# Altium PCB STM32控制器.PCBDOC (part 2 of 2)
Units mil, origin at the board's own origin, x right, y up, seen from the top; angles counter-clockwise.
Board outline 2755.91 x 393.7 mil, 4 copper layers (Top Layer, 2, 3, Bottom Layer), stack 30.634 mil thick; 86 components, 64 nets, 285 pads, 84 vias.
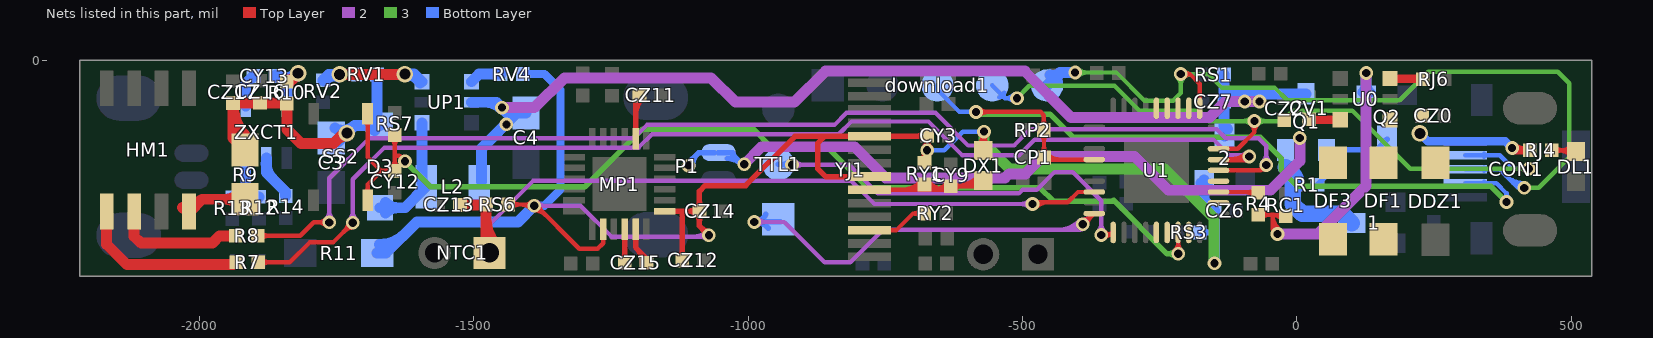
[diagram p4: the nets of this part, all layers, seen from the top]

## Via types
v1: diameter 25, hole 15, Top Layer to Bottom Layer, 77 vias
v2: diameter 30, hole 20, Top Layer to Bottom Layer, 7 vias

## Nets (pads, with @x,y where several pads share a name; then routed paths per layer and width w, separated by ;. In a path a pad name is that pad's centre, name@x,y a point inside that pad or via, vN(x,y) a via of type N, cw(c..) or ccw(c..) an arc to the next point about the centre after c; other vN are vias at no path point) (continued)
NetCY9_2: CY9.2 DX1.1 RY1.1 YJ1.9 | length 883.8
  Top Layer w8: YJ1.9@-778.62,-235.91 CY9.2@-637.06,-235.91 ; DX1.1@-571.57,-218.96 -582.05,-229.44 CY9.2@-630.6,-229.44 CY9.2@-637.06,-235.91 ; -737.78,-235.91 cw(c-737.78,-226.56) -744.39,-233.17 ccw(c-737.78,-226.56) -737.78,-235.91 ; -737.78,-235.91 ccw(c-737.78,-245.26) -744.39,-238.65 cw(c-737.78,-245.26) -737.78,-235.91 ; CY9.2@-637.07,-235.91 cw(c-637.07,-188.09) -672.26,-220.46 ccw(c-637.07,-188.09) CY9.2@-637.07,-235.91 ; -610.07,-229.44 cw(c-610.07,-208.92) -624.58,-223.43 ccw(c-610.07,-208.92) -610.07,-229.44 ; -610.07,-229.44 ccw(c-610.07,-249.96) -624.58,-235.45 cw(c-610.07,-249.96) -610.07,-229.44 ; -722.44,-235.91 ccw(c-722.44,-182.29) -684.53,-220.2 cw(c-722.44,-182.29) -722.44,-235.91 ; -703.13,-235.91 ccw(c-703.13,-201.6) -678.87,-225.86 cw(c-703.13,-201.6) -703.13,-235.91 ; RY1.1@-678.15,-225.88 ccw(c-655.29,-204.85) -655.29,-235.91 cw(c-655.29,-204.85) RY1.1@-678.15,-225.88 ; RY1.1@-666.73,-235.91 ccw(c-666.73,-193.3) -636.61,-223.43 cw(c-666.73,-193.3) RY1.1@-666.73,-235.91 ; -647.42,-235.91 ccw(c-647.42,-212.61) -630.95,-229.09 cw(c-647.42,-212.61) -647.42,-235.91 ; CY9.2@-624.64,-229.44 ccw(c-624.64,-166.89) -580.41,-211.12 cw(c-624.64,-166.89) CY9.2@-624.64,-229.44 ; -605.32,-229.44 ccw(c-605.32,-186.2) -574.75,-216.78 cw(c-605.32,-186.2) -605.32,-229.44 ; DX1.1@-586.01,-229.44 ccw(c-586.01,-205.52) -569.09,-222.43 cw(c-586.01,-205.52) DX1.1@-586.01,-229.44
NetCY13_1: CY13.1 ZXCT1.4 | length 60.9
  Bottom Layer w20: ZXCT1.4@-1915.88,-83.33 -1915.88,-42.31 CY13.1@-1901.86,-28.29
NetCY13_2: CY13.2 R10.1 ZXCT1.5 | length 314.3
  Top Layer w20: v2(-1820.3,-23.26) -1835.61,-38.57 R10.1@-1840.91,-38.57 ; R10.1@-1840.91,-38.57 ccw(c-1840.91,-22.95) -1825.3,-23.19 cw(c-1840.91,-22.95) R10.1@-1840.91,-38.57 ; R10.1@-1840.91,-36.07 ccw(c-1840.91,-17.22) -1827.58,-30.55 cw(c-1840.91,-17.22) R10.1@-1840.91,-36.07
  Bottom Layer w20: CY13.2@-1861.86,-28.29 -1853.12,-28.29 -1841.08,-40.33 ; ZXCT1.5@-1841.08,-83.33 -1841.08,-40.33 ; v2(-1820.3,-23.26) v2@-1824.01,-23.26 ; -1841.08,-40.33 v2@-1824.01,-23.26 ; v2@-1824.01,-23.26 cw(c-1843.97,-3.3) -1860.41,-26.26 ccw(c-1843.97,-3.3) v2@-1824.01,-23.26 ; -1835.17,-34.43 cw(c-1820.3,-49.3) -1820.3,-28.26 ccw(c-1820.3,-49.3) -1835.17,-34.43
NetCZ11_2: CZ11.2 MP1.20 | length 178.9
  Top Layer w10: MP1.20@-1205.37,-142.54 CZ11.2@-1205.37,-61.9 ; -1205.37,-99.68 cw(c-1162.03,-99.68) -1192.67,-69.04 ccw(c-1162.03,-99.68) -1205.37,-99.68 ; CZ11.2@-1205.37,-75.54 cw(c-1186.17,-75.54) -1199.74,-61.97 ccw(c-1186.17,-75.54) CZ11.2@-1205.37,-75.54
NetCZ15_1: CZ15.1 MP1.11 | length 128.2
  Top Layer w10: MP1.11@-1205.37,-307.89 -1205.37,-340.82 -1185.24,-360.95 CZ15.1@-1185.24,-368.96 ; -1203.71,-342.48 cw(c-1230.19,-368.96) -1192.74,-368.96 ccw(c-1230.19,-368.96) -1203.71,-342.48
NetCZ15_2: CZ15.2 MP1.10 | length 118
  Top Layer w10: CZ15.2@-1225.24,-368.96 -1225.05,-368.77 MP1.10@-1225.05,-307.89 ; CZ15.2@-1230.55,-363.65 ccw(c-1243.81,-350.39) -1225.05,-350.39 cw(c-1243.81,-350.39) CZ15.2@-1230.55,-363.65 ; -1225.05,-351.31 ccw(c-1207.6,-351.31) -1219.94,-363.65 cw(c-1207.6,-351.31) -1225.05,-351.31
NetD3_1: D3.1 L2.2 UP1.1 | length 323.1
  Bottom Layer w20: D3.1@-1671.11,-268.43 -1625.34,-268.43 L2.2@-1586.98,-230.06 -1594.89,-222.15 UP1.1@-1594.89,-113.55 ; -1638.22,-268.43 cw(c-1638.22,-235.54) -1661.47,-258.8 ccw(c-1638.22,-235.54) -1638.22,-268.43 ; -1638.22,-268.43 ccw(c-1638.22,-301.32) -1661.47,-278.06 cw(c-1638.22,-301.32) -1638.22,-268.43
NetDF1_2: DF1.2 DF3.1
NetDL1_1: DL1.1 RJ4.2 | length 204
  Top Layer w8: RJ4.2@464.9,-163.64 506.6,-163.64 DL1.1@508.73,-165.77 ; 485.42,-163.64 cw(c485.42,-143.12) 470.91,-157.63 ccw(c485.42,-143.12) 485.42,-163.64 ; 485.42,-163.64 ccw(c485.42,-184.16) 470.91,-169.65 cw(c485.42,-184.16) 485.42,-163.64 ; RJ4.2@475.82,-163.64 cw(c475.82,-197.69) 499.89,-173.61 ccw(c475.82,-197.69) RJ4.2@475.82,-163.64 ; 481.29,-163.64 ccw(c481.29,-137.33) 499.89,-155.94 cw(c481.29,-137.33) 481.29,-163.64
NetHM1_1: HM1.1 R7.1 | length 346.4
  Top Layer w20: HM1.1@-2169.32,-275.26 -2169.32,-335.17 -2132.18,-372.31 -1937.55,-372.31 R7.1@-1933.14,-367.9 ; -1949.81,-372.31 ccw(c-1949.81,-351.23) -1934.91,-366.13 cw(c-1949.81,-351.23) -1949.81,-372.31
NetHM1_2: HM1.2 R8.1 | length 241.1
  Top Layer w20: HM1.2@-2119.32,-275.26 -2119.32,-320.48 -2107.06,-332.73 -1976.65,-332.73 -1963.47,-319.55 R8.1@-1933.99,-319.55
NetHM1_4: HM1.4 R9.2 | length 321.6
  Top Layer w20: HM1.4@-2019.32,-275.26 -2017.49,-275.26 -1995.18,-252.95 ; R9.2@-1917.23,-252.95 -1995.18,-252.95 ; -1995.18,-252.95 cw(c-2006.65,-241.48) -2017.63,-253.42 ccw(c-2006.65,-241.48) -1995.18,-252.95 ; -1953.44,-252.95 cw(c-1953.44,-289.16) -1927.83,-263.56 ccw(c-1953.44,-289.16) -1953.44,-252.95 ; -1953.44,-252.95 ccw(c-1953.44,-216.74) -1927.83,-242.34 cw(c-1953.44,-216.74) -1953.44,-252.95 ; HM1.4@-2031.17,-268.14 ccw(c-2020.78,-256.84) -2009.93,-267.69 cw(c-2020.78,-256.84) HM1.4@-2031.17,-268.14
NetQ1_1: Q1.1 Q2.1 R1.2 | length 188.5
  Bottom Layer w10: R1.2@37.77,-226.5 54.31,-209.95 Q1.1@54.31,-163.12 144.88,-163.12 Q2.1@164.47,-143.54
NetQ2_2: Q2.2 R4.1 RC1.2 | length 858
  Top Layer w8: R4.1@-70.33,-281.01 RC1.2@-22.8,-281.01 ; v1(-34.98,-316.4) -44.19,-307.19 ; -49.81,-281.01 cw(c-49.81,-260.49) -64.32,-275 ccw(c-49.81,-260.49) -49.81,-281.01 ; -49.81,-281.01 ccw(c-49.81,-301.53) -64.32,-287.02 cw(c-49.81,-301.53) -49.81,-281.01 ; -44.18,-307.19 cw(c-48.24,-311.24) -42.9,-313.32 ccw(c-48.24,-311.24) -44.18,-307.19 ; -44.18,-307.19 ccw(c-40.13,-303.14) -38.06,-308.48 cw(c-40.13,-303.14) -44.18,-307.19 ; -44.19,-307.19 -44.19,-281.01 ; -44.19,-281.01 ccw(c-8.47,-281.01) -29.88,-309.6 cw(c-8.47,-281.01) -44.19,-281.01 ; -46.84,-281.01 cw(c-46.84,-310.04) -26.31,-289.51 ccw(c-46.84,-310.04) -46.84,-281.01 ; -44.19,-297 ccw(c-20.44,-297) -34.68,-316 cw(c-20.44,-297) -44.19,-297 ; -34.8,-281.01 ccw(c-34.8,-269) -26.31,-277.49 cw(c-34.8,-269) -34.8,-281.01
  2 w20: v1(-34.98,-316.4) 39.02,-316.4 126.47,-228.95 v1(126.47,-22.69)
  Bottom Layer w20: Q2.2@126.47,-63.54 v1(126.47,-22.69) ; 126.47,-44.22 cw(c107.16,-44.22) 120.81,-57.88 ccw(c107.16,-44.22) 126.47,-44.22 ; 126.47,-44.22 ccw(c145.78,-44.22) 132.13,-57.88 cw(c145.78,-44.22) 126.47,-44.22
NetR12_2: R12.2 R13.2 ZXCT1.3 | length 119.9
  Bottom Layer w20: R13.2@-1940.43,-249.47 -1939.38,-248.42 R12.2@-1891.56,-248.42 ; -1915.88,-248.41 ZXCT1.3@-1915.88,-177.82
NetR14_2: R14.2 ZXCT1.2 | length 145
  Bottom Layer w20: ZXCT1.2@-1878.48,-177.82 -1878.48,-203.94 -1843.02,-239.4 R14.2@-1843.02,-246.99 ; ZXCT1.2@-1878.64,-187.66 ccw(c-1839.74,-187.66) -1867.24,-215.17 cw(c-1839.74,-187.66) ZXCT1.2@-1878.64,-187.66
NetRJ6_1: RJ6.1 U0.6 | length 132.4
  Top Layer w15: U0.6@169.73,-33.18 228.38,-33.18 RJ6.1@229.44,-34.24 ; 184.89,-33.18 cw(c184.89,-18.02) 174.17,-28.74 ccw(c184.89,-18.02) 184.89,-33.18 ; 184.89,-33.18 ccw(c184.89,-48.34) 174.17,-37.62 cw(c184.89,-48.34) 184.89,-33.18 ; 214.81,-33.18 cw(c214.81,-48.86) 225.9,-37.77 ccw(c214.81,-48.86) 214.81,-33.18
NetRV1_1: RV1.1 RV2.1 UP1.3 | length 461.3
  Top Layer w20: v2(-1744.57,-25.49) -1626.45,-25.49 v2(-1625.64,-24.68)
  Bottom Layer w20: RV2.1@-1775.14,-36.02 -1764.61,-25.49 RV1.1@-1716.69,-25.49 ; UP1.3@-1594.89,-38.74 -1608.96,-24.68 v2(-1625.64,-24.68) ; v2(-1625.64,-24.68) cw(c-1625.64,-56.31) -1598.18,-40.62 ccw(c-1625.64,-56.31) v2(-1625.64,-24.68) ; RV2.1@-1774.63,-35.5 cw(c-1756.58,-53.56) -1746.54,-30.08 ccw(c-1756.58,-53.56) RV2.1@-1774.63,-35.5 ; RV2.1@-1773.37,-37.78 cw(c-1743.68,-67.47) -1743.68,-25.49 ccw(c-1743.68,-67.47) RV2.1@-1773.37,-37.78 ; v2@-1623.46,-29.17 cw(c-1614.74,-47.13) -1600.62,-33.02 ccw(c-1614.74,-47.13) v2@-1623.46,-29.17
NetRV4_2: RV4.2 UP1.4 | length 59.3
  Bottom Layer w20: UP1.4@-1504.34,-38.74 -1490.32,-24.72 RV4.2@-1450.83,-24.72
NetRY2_2: RY2.2 YJ1.12 | length 206.1
  Top Layer w8: YJ1.12@-778.62,-309.14 -729.77,-309.14 -699.53,-278.9 RY2.2@-678.9,-278.9 ; -737.78,-309.14 cw(c-737.78,-299.78) -744.39,-306.4 ccw(c-737.78,-299.78) -737.78,-309.14 ; -737.78,-309.14 ccw(c-737.78,-318.49) -744.39,-311.88 cw(c-737.78,-318.49) -737.78,-309.14 ; -699.42,-278.9 cw(c-699.42,-299.42) -684.91,-284.91 ccw(c-699.42,-299.42) -699.42,-278.9 ; -699.42,-278.9 ccw(c-699.42,-258.38) -684.91,-272.89 cw(c-699.42,-258.38) -699.42,-278.9
PA0: CZ13.2 NTC1.1 RS6.2 U1.7 | length 1750.9
  Top Layer w8: v1(-481.82,-261.6) -478.63,-258.42 -417.64,-258.42 -398.9,-239.68 U1.7@-369.06,-239.68 ; v1@-475.81,-267.61 cw(c-453.61,-289.81) -453.61,-258.42 ccw(c-453.61,-289.81) v1@-475.81,-267.61 ; v1@-475.81,-255.59 ccw(c-468.99,-248.77) -468.99,-258.42 cw(c-468.99,-248.77) v1@-475.81,-255.59
  Top Layer w20: CZ13.2@-1525.37,-263.23 -1478.35,-263.23 RS6.2@-1477.71,-262.59 -1477.71,-346.72 NTC1.1@-1480.55,-349.56 ; NTC1.1@-1485.42,-337.03 ccw(c-1504.04,-318.41) -1477.71,-318.41 cw(c-1504.04,-318.41) NTC1.1@-1485.42,-337.03 ; -1477.71,-288.99 ccw(c-1409.76,-288.99) -1457.8,-337.03 cw(c-1409.76,-288.99) -1477.71,-288.99
  2 w8: NTC1.1@-1487.23,-330.65 ccw(c-1511.84,-298.83) -1471.61,-298.83 ; NTC1.1@-1482.34,-336.98 ccw(c-1499.24,-315.13) -1471.61,-315.13 ccw(c-1443.99,-315.13) NTC1.1@-1460.89,-336.98 ; NTC1.1@-1471.61,-350.84 -1471.61,-298.82 ; NTC1.1@-1455.99,-330.65 cw(c-1431.38,-298.83) -1471.61,-298.83 ; v1(-481.82,-261.6) -769.99,-261.6 -812.07,-219.52 -1392.31,-219.52 -1471.61,-298.82 ; -502.34,-261.6 cw(c-502.34,-282.12) -487.83,-267.61 ccw(c-502.34,-282.12) -502.34,-261.6 ; -502.34,-261.6 ccw(c-502.34,-241.08) -487.83,-255.59 cw(c-502.34,-241.08) -502.34,-261.6
PA2: TTL1.1 U1.9 | length 1240.3
  Top Layer w8: v1(-390.2,-298.35) -388.36,-298.35 U1.9@-369.06,-279.05 ; v1@-390.2,-289.85 ccw(c-390.2,-264.88) -372.55,-282.54 cw(c-390.2,-264.88) v1@-390.2,-289.85 ; v1@-381.7,-298.35 cw(c-365.62,-298.35) -376.99,-286.98 ccw(c-365.62,-298.35) v1@-381.7,-298.35
  2 w8: v1(-988.85,-294.4) -934.07,-294.4 -860.39,-368.08 -813.76,-368.08 -754.42,-308.74 -400.6,-308.74 ; v1(-390.2,-298.35) -400.6,-308.74 ; -968.33,-294.4 cw(c-968.33,-273.87) -982.84,-288.38 ccw(c-968.33,-273.87) -968.33,-294.4 ; -968.33,-294.4 ccw(c-968.33,-314.92) -982.84,-300.41 cw(c-968.33,-314.92) -968.33,-294.4 ; -400.6,-308.74 cw(c-394.61,-314.72) -392.41,-306.55 ccw(c-394.61,-314.72) -400.6,-308.74 ; -400.6,-308.74 ccw(c-406.58,-302.76) -398.41,-300.56 cw(c-406.58,-302.76) -400.6,-308.74 ; -435.82,-308.74 ccw(c-435.82,-252.73) -396.21,-292.34 cw(c-435.82,-252.73) -435.82,-308.74 ; -416.5,-308.74 ccw(c-416.5,-272.05) -390.56,-297.99 cw(c-416.5,-272.05) -416.5,-308.74 ; -397.19,-308.74 ccw(c-397.19,-291.36) -384.9,-303.65 cw(c-397.19,-291.36) -397.19,-308.74
  Bottom Layer w10: TTL1.1@-941.57,-294.4 v1(-988.85,-294.4) ; v1@-988.85,-294.4 cw(c-988.85,-328.95) -963.23,-305.76 ccw(c-988.85,-328.95) v1@-988.85,-294.4 ; v1(-988.85,-294.4) ccw(c-988.85,-271.72) -967.8,-280.17 cw(c-988.85,-271.72) v1(-988.85,-294.4) ; TTL1.1@-970.74,-294.4 cw(c-970.74,-276.29) -983.54,-289.09 ccw(c-970.74,-276.29) TTL1.1@-970.74,-294.4 ; TTL1.1@-970.74,-294.4 ccw(c-970.74,-312.5) -983.54,-299.7 cw(c-970.74,-312.5) TTL1.1@-970.74,-294.4
PA3: TTL1.2 U1.10 | length 996.3
  Top Layer w8: v1(-356.4,-317.94) U1.10@-339.06,-317.94 ; U1.10@-334.61,-313.49 U1.10@-339.06,-317.94 ; U1.10@-339.06,-317.94 cw(c-339.06,-304.52) -349.68,-312.74 ccw(c-339.06,-304.52) U1.10@-339.06,-317.94 ; U1.10@-339.06,-317.94 ccw(c-339.06,-331.37) -349.68,-323.15 cw(c-339.06,-331.37) U1.10@-339.06,-317.94 ; v1@-347.58,-317.94 ccw(c-347.58,-300.53) -335.26,-312.84 cw(c-347.58,-300.53) v1@-347.58,-317.94
  2 w8: v1(-920.08,-189.98) -816.09,-189.98 -763.76,-242.31 -506.48,-242.31 -499.92,-235.75 -473.78,-235.75 -441.53,-203.5 -408.58,-203.5 -356.4,-255.68 v1(-356.4,-317.94) ; -899.56,-189.98 cw(c-899.56,-169.46) -914.07,-183.97 ccw(c-899.56,-169.46) -899.56,-189.98 ; -899.56,-189.98 ccw(c-899.56,-210.5) -914.07,-195.99 cw(c-899.56,-210.5) -899.56,-189.98 ; -356.4,-297.42 cw(c-376.92,-297.42) -362.41,-311.93 ccw(c-376.92,-297.42) -356.4,-297.42 ; -356.4,-297.42 ccw(c-335.88,-297.42) -350.39,-311.93 cw(c-335.88,-297.42) -356.4,-297.42
  Bottom Layer w10: TTL1.2@-945.04,-189.31 -944.94,-189.2 TTL1.2@-919.9,-189.2 ; TTL1.2@-940.07,-189.2 cw(c-940.07,-209.97) -925.38,-195.28 ccw(c-940.07,-209.97) TTL1.2@-940.07,-189.2 ; TTL1.2@-936.3,-189.2 ccw(c-936.3,-173.76) -925.38,-184.68 cw(c-936.3,-173.76) TTL1.2@-936.3,-189.2
PA7: U1.14
PA8: U1.20
PA9: R4.2 U1.21 | length 137.4
  Top Layer w8: U1.21@-142.68,-239.68 -71.67,-239.68 R4.2@-70.33,-241.01 ; -94.07,-239.68 cw(c-94.07,-264.75) -76.34,-247.02 ccw(c-94.07,-264.75) -94.07,-239.68 ; -87.63,-239.68 ccw(c-87.63,-223.71) -76.34,-235 cw(c-87.63,-223.71) -87.63,-239.68
PA10: U1.22
PA11: R8.2 U1.23 | length 2378.4
  Top Layer w8: R8.2@-1893.99,-319.55 -1816.32,-319.55 -1791.85,-295.09 v1(-1763.47,-295.09) ; U1.23@-142.68,-200.31 -65.61,-200.31 ; v1(-55.72,-190.41) -65.61,-200.31 ; -1873.47,-319.55 cw(c-1873.47,-299.03) -1887.98,-313.54 ccw(c-1873.47,-299.03) -1873.47,-319.55 ; -1873.47,-319.55 ccw(c-1873.47,-340.07) -1887.98,-325.56 cw(c-1873.47,-340.07) -1873.47,-319.55 ; -1783.99,-295.09 cw(c-1783.99,-315.61) -1769.48,-301.1 ccw(c-1783.99,-315.61) -1783.99,-295.09 ; -1783.99,-295.09 ccw(c-1783.99,-274.57) -1769.48,-289.08 cw(c-1783.99,-274.57) -1783.99,-295.09 ; -65.61,-200.3 cw(c-60.48,-205.44) -58.29,-198.52 ccw(c-60.48,-205.44) -65.61,-200.3 ; -65.61,-200.3 ccw(c-70.75,-195.17) -63.83,-192.98 cw(c-70.75,-195.17) -65.61,-200.3
  2 w8: v1@-1769.48,-289.08 ccw(c-1783.99,-274.57) -1763.47,-274.57 ccw(c-1742.95,-274.57) v1@-1757.46,-289.08 ; v1(-1763.47,-295.09) -1763.47,-214.47 -1690.45,-141.45 -1208.48,-141.45 -1184.41,-117.39 -842.62,-117.39 -820.72,-95.48 -658.65,-95.48 -599.2,-154.93 -515.37,-154.93 -486.11,-125.68 -145.6,-125.68 -129.46,-141.81 -69.57,-141.81 -55.72,-155.65 v1(-55.72,-190.41) ; v1@-61.73,-184.4 ccw(c-76.24,-169.89) -55.72,-169.89 ccw(c-35.2,-169.89) v1@-49.71,-184.4
PA12: R7.2 U1.24 | length 2351.9
  Top Layer w8: R7.2@-1893.14,-367.9 -1835.51,-367.9 -1799.29,-331.67 -1756.62,-331.67 v1(-1720.77,-295.82) ; U1.24@-142.68,-180.62 U1.24@-131.5,-180.62 ; -1872.62,-367.9 cw(c-1872.62,-347.38) -1887.13,-361.89 ccw(c-1872.62,-347.38) -1872.62,-367.9 ; -1872.62,-367.9 ccw(c-1872.62,-388.42) -1887.13,-373.91 cw(c-1872.62,-388.42) -1872.62,-367.9 ; -1735.28,-310.33 cw(c-1720.77,-324.84) -1720.77,-304.32 ccw(c-1720.77,-324.84) -1735.28,-310.33 ; -1735.28,-310.33 ccw(c-1749.79,-295.82) -1729.27,-295.82 cw(c-1749.79,-295.82) -1735.28,-310.33
  Top Layer w10: U1.24@-131.5,-180.62 -92.34,-180.62 v1(-86.66,-174.94) ; -118.48,-180.62 ccw(c-118.48,-143.11) -91.96,-169.63 cw(c-118.48,-143.11) -118.48,-180.62
  2 w8: v1@-1726.78,-289.81 ccw(c-1741.29,-275.3) -1720.77,-275.3 ccw(c-1700.25,-275.3) v1@-1714.76,-289.81 ; v1(-1720.77,-295.82) -1720.77,-216.65 -1662.94,-158.81 -1199.8,-158.81 -1175.34,-134.35 -834.86,-134.35 -811.7,-111.19 -671.34,-111.19 -610.11,-172.42 -506.03,-172.42 -477.82,-144.22 -151.95,-144.22 -123.75,-172.42 -89.17,-172.42 v1(-86.66,-174.94) ; -113.25,-172.42 cw(c-113.25,-201.53) -92.67,-180.95 ccw(c-113.25,-201.53) -113.25,-172.42 ; -101.1,-172.42 ccw(c-101.1,-160.49) -92.67,-168.93 cw(c-101.1,-160.49) -101.1,-172.42
PA13: CON1.2 download1.4 U1.25 | length 1628.4
  Top Layer w8: U1.25@-142.68,-160.93 -107.75,-160.93 -77.31,-130.49 ; v1(-77.31,-110.44) -77.31,-130.49 ; -77.31,-130.49 cw(c-57.89,-130.49) -71.39,-116.54 ccw(c-57.89,-130.49) -77.31,-130.49 ; -77.31,-130.49 ccw(c-96.72,-130.49) -83.22,-116.54 cw(c-96.72,-130.49) -77.31,-130.49
  3 w8: v1(-510.19,-68.64) -487.73,-46.19 -332.29,-46.19 -286.66,-91.82 -179.2,-91.82 -160.58,-110.44 -25.94,-110.44 -7.32,-91.82 101.4,-91.82 206.94,-197.36 v1(422.81,-197.36) ; -97.83,-110.44 cw(c-97.83,-130.96) -83.32,-116.45 ccw(c-97.83,-130.96) -97.83,-110.44 ; -97.83,-110.44 ccw(c-97.83,-89.92) -83.32,-104.43 cw(c-97.83,-89.92) -97.83,-110.44 ; -56.79,-110.44 cw(c-56.79,-89.92) -71.3,-104.43 ccw(c-56.79,-89.92) -56.79,-110.44 ; -56.79,-110.44 ccw(c-56.79,-130.96) -71.3,-116.45 cw(c-56.79,-130.96) -56.79,-110.44
  Bottom Layer w8: download1.4@-555.09,-45.38 -531.83,-68.64 ; v1(-510.19,-68.64) -531.83,-68.64 ; CON1.2@307.06,-172.67 370.15,-172.67 394.84,-197.36 v1(422.81,-197.36) ; -531.83,-68.64 cw(c-525.87,-62.68) -533.12,-58.39 ccw(c-525.87,-62.68) -531.83,-68.64 ; -531.83,-68.64 ccw(c-537.79,-74.6) -542.08,-67.35 cw(c-537.79,-74.6) -531.83,-68.64 ; -530.71,-68.64 cw(c-530.71,-89.16) -516.2,-74.65 ccw(c-530.71,-89.16) -530.71,-68.64 ; -530.71,-68.64 ccw(c-530.71,-48.12) -516.2,-62.63 cw(c-530.71,-48.12) -530.71,-68.64 ; 347.91,-172.67 cw(c347.91,-163.32) 341.29,-169.93 ccw(c347.91,-163.32) 347.91,-172.67 ; 347.91,-172.67 ccw(c347.91,-182.02) 341.29,-175.41 cw(c347.91,-182.02) 347.91,-172.67
PA14: CON1.3 download1.5 U1.28 | length 1988.6
  Top Layer w8: v1(-211.46,-24.8) -194.56,-24.8 ; U1.28@-177.13,-87.12 -177.13,-42.23 -194.56,-24.8 ; -194.56,-24.8 cw(c-194.56,-12.25) -204.64,-19.73 ccw(c-194.56,-12.25) -194.56,-24.8 ; -194.56,-24.8 ccw(c-194.56,-37.34) -204.64,-29.86 cw(c-194.56,-37.34) -194.56,-24.8
  3 w8: v1(-404.07,-21.93) -328.78,-21.93 -277.51,-73.2 -225.33,-73.2 -211.46,-59.33 v1(-211.46,-24.8) -161.61,-24.8 -137.04,-49.37 -40.58,-49.37 -17.41,-72.54 187.49,-72.54 239.53,-20.51 475.82,-20.51 496.83,-41.51 496.83,-176.61 441.23,-232.21 v1(414.76,-232.21) ; -383.55,-21.93 cw(c-383.55,-1.41) -398.06,-15.92 ccw(c-383.55,-1.41) -383.55,-21.93 ; -383.55,-21.93 ccw(c-383.55,-42.45) -398.06,-27.94 cw(c-383.55,-42.45) -383.55,-21.93 ; -211.46,-45.32 cw(c-190.94,-45.32) v1@-205.45,-30.81 ; -211.46,-45.32 ccw(c-231.98,-45.32) -217.47,-30.81 cw(c-231.98,-45.32) -211.46,-45.32 ; -211.46,-45.32 cw(c-190.94,-45.32) v1@-205.45,-30.81 ; v1@-205.45,-30.81 cw(c-190.94,-45.32) -190.94,-24.8 ; v1@-205.45,-30.81 cw(c-190.94,-45.32) -190.94,-24.8 ; -190.94,-24.8 cw(c-190.94,-4.27) -205.45,-18.78 ccw(c-190.94,-4.27) -190.94,-24.8
  Bottom Layer w8: CON1.3@307.06,-198.26 369.61,-198.26 403.55,-232.21 v1(414.76,-232.21) ; 347.91,-198.26 cw(c347.91,-188.91) 341.29,-195.52 ccw(c347.91,-188.91) 347.91,-198.26 ; 347.91,-198.26 ccw(c347.91,-207.61) 341.29,-201 cw(c347.91,-207.61) 347.91,-198.26 ; 381.12,-209.77 ccw(c414.76,-176.14) 414.76,-223.71 cw(c414.76,-176.14) 381.12,-209.77 ; 394.78,-223.43 ccw(c414.76,-203.45) 414.76,-231.71 cw(c414.76,-203.45) 394.78,-223.43
  Bottom Layer w20: download1.5@-455.09,-45.38 -431.63,-21.93 ; v1(-404.07,-21.93) -431.63,-21.93 ; -431.63,-21.93 cw(c-444.65,-8.91) -449.72,-26.61 ccw(c-444.65,-8.91) -431.63,-21.93 ; -431.63,-21.93 ccw(c-418.62,-34.95) -436.31,-40.01 cw(c-418.62,-34.95) -431.63,-21.93
PA15: U1.29
PB0: U1.15
PB1: CY12.1 RS7.2 SS2.1 U1.16 | length 2335.8
  Top Layer w8: SS2.1@-1693.79,-97.24 -1693.79,-176.41 -1668.89,-201.31 ; SS2.1@-1693.68,-254.43 -1693.68,-226.1 -1668.89,-201.31 ; -1644.32,-173.56 -1635.93,-173.56 ; RS7.2@-1644.32,-135.69 -1644.32,-201.28 -1668.89,-201.31 ; v1(-1625.62,-183.87) -1635.93,-173.56 ; U1.16@-216.5,-313.49 v1(-216.2,-352.39) ; -1693.79,-121.19 cw(c-1679.69,-121.19) -1689.66,-111.21 ccw(c-1679.69,-121.19) -1693.79,-121.19 ; -1693.79,-121.19 ccw(c-1707.9,-121.19) -1697.93,-111.21 cw(c-1707.9,-121.19) -1693.79,-121.19 ; -1693.68,-230.48 cw(c-1707.78,-230.48) -1697.81,-240.46 ccw(c-1707.78,-230.48) -1693.68,-230.48 ; -1693.68,-230.48 ccw(c-1679.57,-230.48) -1689.55,-240.46 cw(c-1679.57,-230.48) -1693.68,-230.48 ; -1664.81,-201.31 cw(c-1664.81,-221.83) -1650.3,-207.32 ccw(c-1664.81,-221.83) -1664.81,-201.31 ; -1664.81,-201.31 ccw(c-1664.81,-180.79) CY12.1@-1650.3,-195.3 ; -1664.81,-201.31 ccw(c-1664.81,-180.79) CY12.1@-1650.3,-195.3 ; CY12.1@-1650.3,-195.3 ccw(c-1664.74,-180.87) -1644.32,-180.87 cw(c-1664.74,-180.87) CY12.1@-1650.3,-195.3 ; -1644.32,-156.21 cw(c-1623.8,-156.21) -1638.31,-141.7 ccw(c-1623.8,-156.21) -1644.32,-156.21 ; -1644.32,-156.21 ccw(c-1664.84,-156.21) -1650.33,-141.7 cw(c-1664.84,-156.21) -1644.32,-156.21 ; -1635.93,-173.56 cw(c-1641.75,-179.39) -1633.81,-181.59 ccw(c-1641.75,-179.39) -1635.93,-173.56 ; -1635.93,-173.56 ccw(c-1630.1,-167.73) -1627.89,-175.67 cw(c-1630.1,-167.73) -1635.93,-173.56 ; U1.16@-216.36,-331.87 cw(c-236.88,-332.02) -222.26,-346.42 ccw(c-236.88,-332.02) U1.16@-216.36,-331.87 ; U1.16@-216.36,-331.87 ccw(c-195.84,-331.71) -210.24,-346.33 cw(c-195.84,-331.71) U1.16@-216.36,-331.87 ; -1644.32,-180.72 ccw(c-1623.69,-180.72) -1638.28,-195.3 cw(c-1623.69,-180.72) -1644.32,-180.72
  3 w10: v1(-1625.62,-183.87) -1579.31,-230.18 -1297.48,-230.18 -1192.47,-125.18 -990.46,-125.18 -957.25,-158.38 -855.25,-158.38 -781.55,-232.09 -467.85,-232.09 -443.47,-256.48 -335.87,-256.48 -334.08,-254.68 -236.37,-352.39 v1(-216.2,-352.39) ; -234.31,-352.39 cw(c-234.31,-370.49) -221.51,-357.69 ccw(c-234.31,-370.49) -234.31,-352.39 ; -234.31,-352.39 ccw(c-234.31,-334.28) -221.51,-347.08 cw(c-234.31,-334.28) -234.31,-352.39
PB2: U1.17
PB3: U1.30
PB4: U1.31
PB5: U1.32
RESET: CON1.4 CP1.1 download1.3 RP2.2 U1.4 | length 1918.6
  Top Layer w8: v1(-584.66,-93.79) -466.92,-93.79 -461.07,-99.65 RP2.2@-461.07,-126.8 -460.87,-126.99 CP1.1@-460.87,-176.72 -456.97,-180.62 U1.4@-369.06,-180.62 ; -564.14,-93.79 cw(c-564.14,-73.27) -578.65,-87.78 ccw(c-564.14,-73.27) -564.14,-93.79 ; -564.14,-93.79 ccw(c-564.14,-114.31) -578.65,-99.8 cw(c-564.14,-114.31) -564.14,-93.79 ; -461.07,-106.27 cw(c-481.59,-106.27) -467.08,-120.78 ccw(c-481.59,-106.27) -461.07,-106.27 ; -461.07,-106.27 ccw(c-440.55,-106.27) -455.06,-120.78 cw(c-440.55,-106.27) -461.07,-106.27 ; -460.87,-156.2 cw(c-481.39,-156.2) -466.88,-170.71 ccw(c-481.39,-156.2) -460.87,-156.2 ; -460.87,-156.2 ccw(c-440.35,-156.2) CP1.1@-454.86,-170.71 ; -460.87,-156.2 ccw(c-440.35,-156.2) CP1.1@-454.86,-170.71 ; CP1.1@-454.86,-170.71 ccw(c-430.93,-146.77) -430.93,-180.62 cw(c-430.93,-146.77) CP1.1@-454.86,-170.71 ; RP2.2@-467.08,-132.81 cw(c-482.06,-147.79) -460.87,-147.79 ccw(c-482.06,-147.79) RP2.2@-467.08,-132.81 ; -460.87,-146.84 cw(c-441.02,-146.84) -455.06,-132.81 ccw(c-441.02,-146.84) -460.87,-146.84
  3 w10: v1(-584.66,-93.79) -580.66,-97.79 -449.89,-97.79 -407.83,-139.85 -66.97,-139.85 -27.98,-178.84 -27.98,-200.49 1.04,-229.51 354,-229.51 v1(382.42,-257.93)
  Bottom Layer w8: download1.3@-655.09,-45.38 -655.09,-53.43 -614.72,-93.79 v1(-584.66,-93.79) ; CON1.4@307.06,-223.85 363.91,-223.85 382.42,-242.36 ; v1(382.42,-257.93) 382.42,-242.36 ; 347.91,-223.85 cw(c347.91,-214.5) 341.29,-221.11 ccw(c347.91,-214.5) 347.91,-223.85 ; 347.91,-223.85 ccw(c347.91,-233.21) 341.29,-226.59 cw(c347.91,-233.21) 347.91,-223.85 ; 382.42,-242.36 cw(c372.42,-242.36) 377.82,-250.78 ccw(c372.42,-242.36) 382.42,-242.36 ; 382.42,-242.36 ccw(c392.42,-242.36) 387.02,-250.78 cw(c392.42,-242.36) 382.42,-242.36
VCC3.3: 2.1 CY3.1 CZ6.1 CZ12.1 CZ14.1 DX1.2 MP1.8 MP1.13 R11.2 RS3.1 RS6.1 RV4.1 RY1.2 YJ1.5 YJ1.8 | length 4324.9
  Top Layer w8: RS6.1@-1437.71,-262.59 -1388.34,-262.59 -1307.87,-343.06 -1274.52,-343.06 -1264.42,-332.97 MP1.8@-1264.42,-307.89 ; DX1.2@-571.57,-163.96 -571.57,-131.03 v1(-570.22,-129.68) ; -1417.19,-262.59 cw(c-1417.19,-242.07) -1431.7,-256.58 ccw(c-1417.19,-242.07) -1417.19,-262.59 ; -1417.19,-262.59 ccw(c-1417.19,-283.11) -1431.7,-268.6 cw(c-1417.19,-283.11) -1417.19,-262.59 ; v1@-571.57,-132.78 cw(c-601.75,-132.78) -580.41,-154.12 ccw(c-601.75,-132.78) v1@-571.57,-132.78 ; v1@-571.57,-132.78 ccw(c-541.39,-132.78) -562.73,-154.12 cw(c-541.39,-132.78) v1@-571.57,-132.78 ; -1415.52,-262.59 cw(c-1415.52,-290.08) -1396.08,-270.64 ccw(c-1415.52,-290.08) -1415.52,-262.59 ; -1405.66,-262.59 ccw(c-1405.66,-249.04) -1396.08,-258.62 cw(c-1405.66,-249.04) -1405.66,-262.59 ; v1@-1390.07,-273.13 cw(c-1390.07,-302.75) -1369.12,-281.81 ccw(c-1390.07,-302.75) v1@-1390.07,-273.13 ; v1@-1381.57,-264.63 ccw(c-1370.15,-264.63) -1378.23,-272.7 cw(c-1370.15,-264.63) v1@-1381.57,-264.63 ; v1@-576.23,-135.69 cw(c-587.47,-146.94) -571.57,-146.94 ccw(c-587.47,-146.94) v1@-576.23,-135.69 ; DX1.2@-571.57,-153.47 cw(c-546.43,-153.47) -564.21,-135.69 ccw(c-546.43,-153.47) DX1.2@-571.57,-153.47
  Top Layer w10: MP1.13@-1152.22,-274.43 -1089.2,-274.43 CZ14.1@-1088.86,-274.77 ; CZ12.1@-1120.14,-364.47 -1120.14,-274.43 ; v1(-1071.66,-318.73) -1088.86,-301.54 -1088.86,-238.77 -1078.37,-228.28 -1004.83,-228.28 -914.83,-138.27 -675.32,-138.27 CY3.1@-673.83,-136.77 RY1.2@-673.83,-181.52 ; -860.62,-138.27 -873.31,-150.95 -873.31,-197.02 -858.83,-211.5 YJ1.8@-778.62,-211.5 ; RY1.2@-678.52,-186.21 RY1.2@-673.83,-181.52 ; -1120.14,-346.37 cw(c-1138.25,-346.37) -1125.45,-359.17 ccw(c-1138.25,-346.37) -1120.14,-346.37 ; -1120.14,-346.37 ccw(c-1102.04,-346.37) -1114.84,-359.17 cw(c-1102.04,-346.37) -1120.14,-346.37 ; CZ14.1@-1094.16,-280.07 cw(c-1106.96,-292.88) -1088.86,-292.88 ; CZ14.1@-1094.16,-280.07 ccw(c-1107.79,-293.7) -1107.79,-274.43 cw(c-1107.79,-293.7) CZ14.1@-1094.16,-280.07 ; CZ14.1@-1094.16,-280.07 cw(c-1106.96,-292.88) -1088.86,-292.88 ; CZ14.1@-1094.16,-269.47 ccw(c-1106.96,-256.66) -1088.86,-256.66 ; CZ14.1@-1094.16,-269.47 cw(c-1106.14,-257.49) -1106.14,-274.43 ccw(c-1106.14,-257.49) CZ14.1@-1094.16,-269.47 ; CZ14.1@-1094.16,-269.47 ccw(c-1106.96,-256.66) -1088.86,-256.66 ; -1088.86,-292.88 cw(c-1070.75,-292.88) -1083.55,-280.07 ccw(c-1070.75,-292.88) -1088.86,-292.88 ; -1088.86,-256.66 ccw(c-1070.75,-256.66) -1083.55,-269.47 cw(c-1070.75,-256.66) -1088.86,-256.66 ; -1084.47,-305.93 cw(c-1097.27,-318.73) -1079.16,-318.73 ccw(c-1097.27,-318.73) -1084.47,-305.93 ; -1084.47,-305.93 ccw(c-1071.66,-293.12) -1071.66,-311.23 cw(c-1071.66,-293.12) -1084.47,-305.93 ; CY3.1@-679.13,-142.08 cw(c-691.93,-154.88) v1@-673.83,-154.88 ; CY3.1@-679.13,-142.08 ccw(c-688.32,-151.26) -688.32,-138.27 cw(c-688.32,-151.26) CY3.1@-679.13,-142.08 ; CY3.1@-679.13,-142.08 cw(c-691.93,-154.88) v1@-673.83,-154.88 ; RY1.2@-673.83,-181.52 cw(c-655.88,-181.52) -668.54,-168.8 ccw(c-655.88,-181.52) RY1.2@-673.83,-181.52 ; RY1.2@-673.83,-181.52 ccw(c-691.77,-181.52) -679.12,-168.8 cw(c-691.77,-181.52) RY1.2@-673.83,-181.52 ; v1@-673.83,-154.88 cw(c-655.72,-154.88) -668.52,-142.08 ccw(c-655.72,-154.88) v1@-673.83,-154.88 ; CY3.1@-673.83,-145.37 cw(c-691.93,-145.37) -679.13,-158.18 ccw(c-691.93,-145.37) CY3.1@-673.83,-145.37 ; CY3.1@-673.83,-145.37 ccw(c-655.72,-145.37) -668.52,-158.18 cw(c-655.72,-145.37) CY3.1@-673.83,-145.37 ; -695.55,-138.27 ccw(c-695.55,-115.05) -679.13,-131.47 cw(c-695.55,-115.05) -695.55,-138.27 ; RY1.2@-683.82,-180.91 ccw(c-707.96,-156.78) -673.83,-156.78 cw(c-707.96,-156.78) RY1.2@-683.82,-180.91
  2 w8: v1(-1390.07,-264.63) -1305.77,-264.63 -1249.36,-321.03 -1073.97,-321.03 v1(-1071.66,-318.73) ; -1369.55,-264.63 cw(c-1369.55,-244.11) -1384.06,-258.62 ccw(c-1369.55,-244.11) -1369.55,-264.63 ; -1369.55,-264.63 ccw(c-1369.55,-285.15) -1384.06,-270.64 cw(c-1369.55,-285.15) -1369.55,-264.63 ; -1097.75,-321.03 ccw(c-1097.75,-292.65) -1077.68,-312.72 cw(c-1097.75,-292.65) -1097.75,-321.03 ; -1086.63,-321.03 cw(c-1086.63,-333.69) -1077.68,-324.74 ccw(c-1086.63,-333.69) -1086.63,-321.03
  3 w20: v1(-570.22,-129.68) -570.22,-150.45 -523.19,-197.48 -240.72,-197.48 -151.16,-287.03 -151.16,-368.54 v1(-150.17,-369.53)
  Bottom Layer w8: v1(-673.83,-163.48) -642.67,-163.48 -608.87,-129.68 v1(-570.22,-129.68)
  Bottom Layer w10: RS3.1@-177.13,-313.49 -152.75,-313.49 -150.17,-310.91 ; -159.02,-313.49 cw(c-159.02,-295.39) -171.83,-308.19 ccw(c-159.02,-295.39) -159.02,-313.49 ; -159.02,-313.49 ccw(c-159.02,-331.6) -171.83,-318.8 cw(c-159.02,-331.6) -159.02,-313.49
  Bottom Layer w15: RV4.1@-1410.83,-24.72 -1371.18,-24.72 -1341.95,-53.94 -1341.95,-234.87 -1371.71,-264.63 v1(-1390.07,-264.63)
  Bottom Layer w20: R11.2@-1676.46,-351.04 -1660.6,-351.04 -1603.96,-294.4 -1419.84,-294.4 v1(-1390.07,-264.63) ; 2.1@-168.77,-217.94 -168.77,-255.12 CZ6.1@-150.17,-273.72 v1(-150.17,-369.53) ; -168.77,-237.25 cw(c-149.46,-237.25) -163.12,-223.6 ccw(c-149.46,-237.25) -168.77,-237.25 ; -168.77,-237.25 ccw(c-188.09,-237.25) -174.43,-223.6 cw(c-188.09,-237.25) -168.77,-237.25 ; R11.2@-1672.52,-335.45 ccw(c-1672.52,-269.03) -1625.56,-316 cw(c-1672.52,-269.03) R11.2@-1672.52,-335.45
VCC5V: C3.2 CZ16.2 CZ17.2 D3.2 R9.1 R10.2 RV1.2 | length 1019.1
  Top Layer w20: R9.1@-1917.23,-162.95 -1939.08,-141.1 CZ17.2@-1939.08,-77.61 ; v2(-1731.57,-132.29) -1736.7,-132.29 -1755.64,-151.24 -1815.36,-151.24 -1840.91,-125.68 R10.2@-1840.91,-78.57 -1841.88,-77.61 CZ17.2@-1939.08,-77.61 ; CZ17.2@-1939.08,-77.61 ccw(c-1848.07,-77.61) -1907.44,-146.58 cw(c-1848.07,-77.61) CZ17.2@-1939.08,-77.61 ; -1939.08,-121.21 ccw(c-1885.61,-121.21) -1920.49,-161.74 cw(c-1885.61,-121.21) -1939.08,-121.21 ; -1748.86,-144.46 cw(c-1731.57,-161.75) -1731.57,-137.29 ccw(c-1731.57,-161.75) -1748.86,-144.46
  Bottom Layer w20: C3.2@-1747.69,-148.42 -1717.7,-118.43 ; RV1.2@-1676.69,-25.49 -1676.69,-112.85 D3.2@-1671.11,-118.43 -1717.7,-118.43 ; -1717.7,-118.43 cw(c-1738.76,-97.37) -1753.11,-123.47 ccw(c-1738.76,-97.37) -1717.7,-118.43 ; -1703.99,-118.43 cw(c-1703.99,-151.32) -1680.74,-128.06 ccw(c-1703.99,-151.32) -1703.99,-118.43 ; -1703.99,-118.43 ccw(c-1703.99,-85.54) -1680.74,-108.8 cw(c-1703.99,-85.54) -1703.99,-118.43
VCC+4.2V: 2.3 C4.2 CZ7.1 L2.1 Q1.3 RS1.1 UP1.5 | length 2418.6
  2 w20: v1(-1448.93,-85.91) -1389.24,-85.91 -1335.12,-31.78 -1067.63,-31.78 -1023.44,-75.97 -915.35,-75.97 -858.93,-19.55 -495.85,-19.55 -411.27,-104.13 -159.02,-104.13 -129.58,-74.69 v1(-68.13,-74.69)
  Bottom Layer w20: UP1.5@-1504.34,-76.14 -1458.66,-76.14 -1432.06,-102.75 ; L2.1@-1486.49,-220.68 -1486.49,-160.31 -1421.81,-95.63 C4.2@-1404.98,-95.63 ; RS1.1@-132.58,-25.63 -132.58,-137.13 2.3@-131.77,-137.94 ; CZ7.1@-132.03,-75.34 -117.42,-60.72 ; Q1.3@16.91,-60.72 -117.42,-60.72 ; -117.42,-60.72 cw(c-117.42,-82.12) -97.08,-75.46 ccw(c-117.42,-82.12) -117.42,-60.72 ; -1478.53,-76.14 cw(c-1478.53,-115.51) -1450.69,-87.67 ccw(c-1478.53,-115.51) -1478.53,-76.14 ; -132.58,-109.67 ccw(c-110.5,-109.67) -126.12,-125.28 cw(c-110.5,-109.67) -132.58,-109.67 ; CZ7.1@-130.27,-77.11 cw(c-90.71,-116.67) -90.71,-60.72 ccw(c-90.71,-116.67) CZ7.1@-130.27,-77.11 ; -107.87,-60.72 cw(c-107.87,-114.43) -69.89,-76.45 ccw(c-107.87,-114.43) -107.87,-60.72 ; v1@-92.93,-76.45 cw(c-54.96,-114.43) -54.96,-60.72 ccw(c-54.96,-114.43) v1@-92.93,-76.45
  other v1: -1440.81,-116.46 -94.7,-74.69
VCCBAT: 1.3 CV1.1 CZ2.1 DF3.2 P1.1 Q1.2 R1.1 U0.3 | length 1804.8
  Top Layer w15: CV1.1@22.42,-107.23 23.18,-107.98 U0.3@79.18,-107.98 ; 64.02,-107.98 cw(c64.02,-123.14) 74.74,-112.42 ccw(c64.02,-123.14) 64.02,-107.98 ; 64.02,-107.98 ccw(c64.02,-92.82) 74.74,-103.54 cw(c64.02,-92.82) 64.02,-107.98 ; CV1.1@25.96,-103.69 ccw(c36.31,-93.33) 36.31,-107.98 cw(c36.31,-93.33) CV1.1@25.96,-103.69
  2 w20: v1(-1007.23,-189.07) -975.39,-157.24 -806.46,-157.24 -749.25,-214.44 -532.27,-214.44 -524.38,-206.55 -494.39,-206.55 -462.44,-174.6 -295.56,-174.6 -233.62,-236.53 -48.19,-236.53 5.46,-182.88 v1(5.46,-141.45)
  Bottom Layer w10: v1@-1111.36,-189.09 -1090.07,-167.81 P1.1@-1062.31,-167.81 ; P1.1@-1054.26,-167.92 -1032.28,-167.92 v1@-1010.58,-189.63 ; v1@-1101.32,-191.65 cw(c-1070.91,-191.65) -1092.41,-170.15 ccw(c-1070.91,-191.65) v1@-1101.32,-191.65 ; P1.1@-1038.51,-178.67 cw(c-1038.51,-219.64) -1009.54,-190.67 ccw(c-1038.51,-219.64) P1.1@-1038.51,-178.67 ; P1.1@-1027.76,-167.92 ccw(c-1016.83,-167.92) -1024.56,-175.65 cw(c-1016.83,-167.92) P1.1@-1027.76,-167.92
  Bottom Layer w30: -20.49,-194.22 -7.41,-207.31 -7.41,-261.87 9.72,-279 82.47,-279 1.3@99.86,-296.38 ; -7.87,-206.85 cw(c-27.52,-226.5) R1.1@0.27,-226.5 ; -7.87,-206.85 cw(c-27.52,-226.5) R1.1@0.27,-226.5 ; -7.87,-206.85 cw(c-27.52,-226.5) R1.1@0.27,-226.5 ; -7.87,-206.85 cw(c-27.52,-226.5) R1.1@0.27,-226.5
  other v1: -1108.82,-191.65
XuotgVBUS: CON1.1 CZ0.2 DDZ1.2 DF1.1 RJ4.1 U0.4 | length 253.5
  Top Layer w15: v1(392.51,-159.62) 396.52,-163.64 RJ4.1@424.9,-163.64 ; v1@396.04,-156.09 ccw(c414.28,-137.85) 414.28,-163.64 cw(c414.28,-137.85) v1@396.04,-156.09
  Bottom Layer w15: v2(224.56,-132.98) 238.66,-147.08 379.97,-147.08 v1(392.51,-159.62)
pads on no net: CON1.0@290.86,-101.35 CON1.0@336.75,-324.17 CON1.0@337.13,-72.12 MP1.2 MP1.3 MP1.4 MP1.5 MP1.12 MP1.14 MP1.15 MP1.16 MP1.17 MP1.19 MP1.21 MP1.22 P1.10 P2.0 P2.10 U0.1 U0.5 U1.2 U1.3 UP1.6 YJ1.6 YJ1.19

## Polygon pours and split planes (outlines as drawn)
GND on Top Layer (solid, remove dead copper): -2237.45,14.15 555.99,14.15 555.99,-405.34 -2230.64,-405.34
VCC+4.2V on 2 (solid, remove dead copper): -2235,12.93 554.63,12.93 554.63,-415.56 -2239.49,-415.56
GND on 3 (solid, remove dead copper): -2234.72,16.88 553.27,16.88 553.27,-418.96 -2238.81,-418.96
GND on Bottom Layer (solid, remove dead copper): -2243.19,16.73 550.35,16.73 550.35,-412.9 -2234.13,-412.9

## Keep-outs
Keep-Out Layer:
  lines w1: -999.21,-393.7 -999.21,-364.17 -900.79,-364.17 -900.79,-393.7 ; -999.21,0 -999.21,-29.53 -900.79,-29.53 -900.79,0 ; 0,-393.7 0,-364.17 29.53,-364.17 29.53,-393.7 ; 0,0 0,-29.53 29.53,-29.53 29.53,0 ; -2218.11,-393.7 -2218.11,0 537.8,0 537.8,-393.7 -2218.11,-393.7

## Other copper
Top Layer:
  rectangle net GND: -1157.22,-176.01 -1131.27,-145.64
  rectangle net GND: -39.16,-71.12 -10.75,-13.49
  rectangle net GND: -42.53,-71.12 37.2,-43.9
  rectangle net NetDF1_2: 48.09,-371.92 170.38,-302.24
  rectangle net VCCBAT: -14.38,-191.38 79.18,-107.98
  rectangle net XuotgVBUS: 157.05,-204.13 241.01,-95.81
2:
  rectangle net VCC+4.2V: -1471.73,-123.77 -1411.11,-67.47
  rectangle net VCCBAT: -1122.44,-203.8 -990.85,-164.6
3:
  rectangle net GND: -637.27,-374.26 -568.58,-335.04
Bottom Layer:
  rectangle net VCCBAT: -20.49,-194.22 19.63,-122.71

## Silkscreen, mask and mechanical layers (free items; w line width, h text height)
Bottom Overlay:
  lines w1: -2218.11,0 -999.21,0 ; -900.79,0 0,0

## Text inside footprints (layer, text, board x,y; h text height)
L2: Mechanical 10 "1" at -1493.25,-237.96 h15.75; Mechanical 10 "2" at -1597.58,-237.96 h15.75